# Altium PCB edgeDetector.PcbDoc
Units mm, origin at the board's own origin, x right, y up, seen from the top; angles counter-clockwise.
Board outline 152.4 x 101.6 mm, 2 copper layers (Top Layer, Bottom Layer); 5 components, 19 nets, 22 pads, 0 vias.
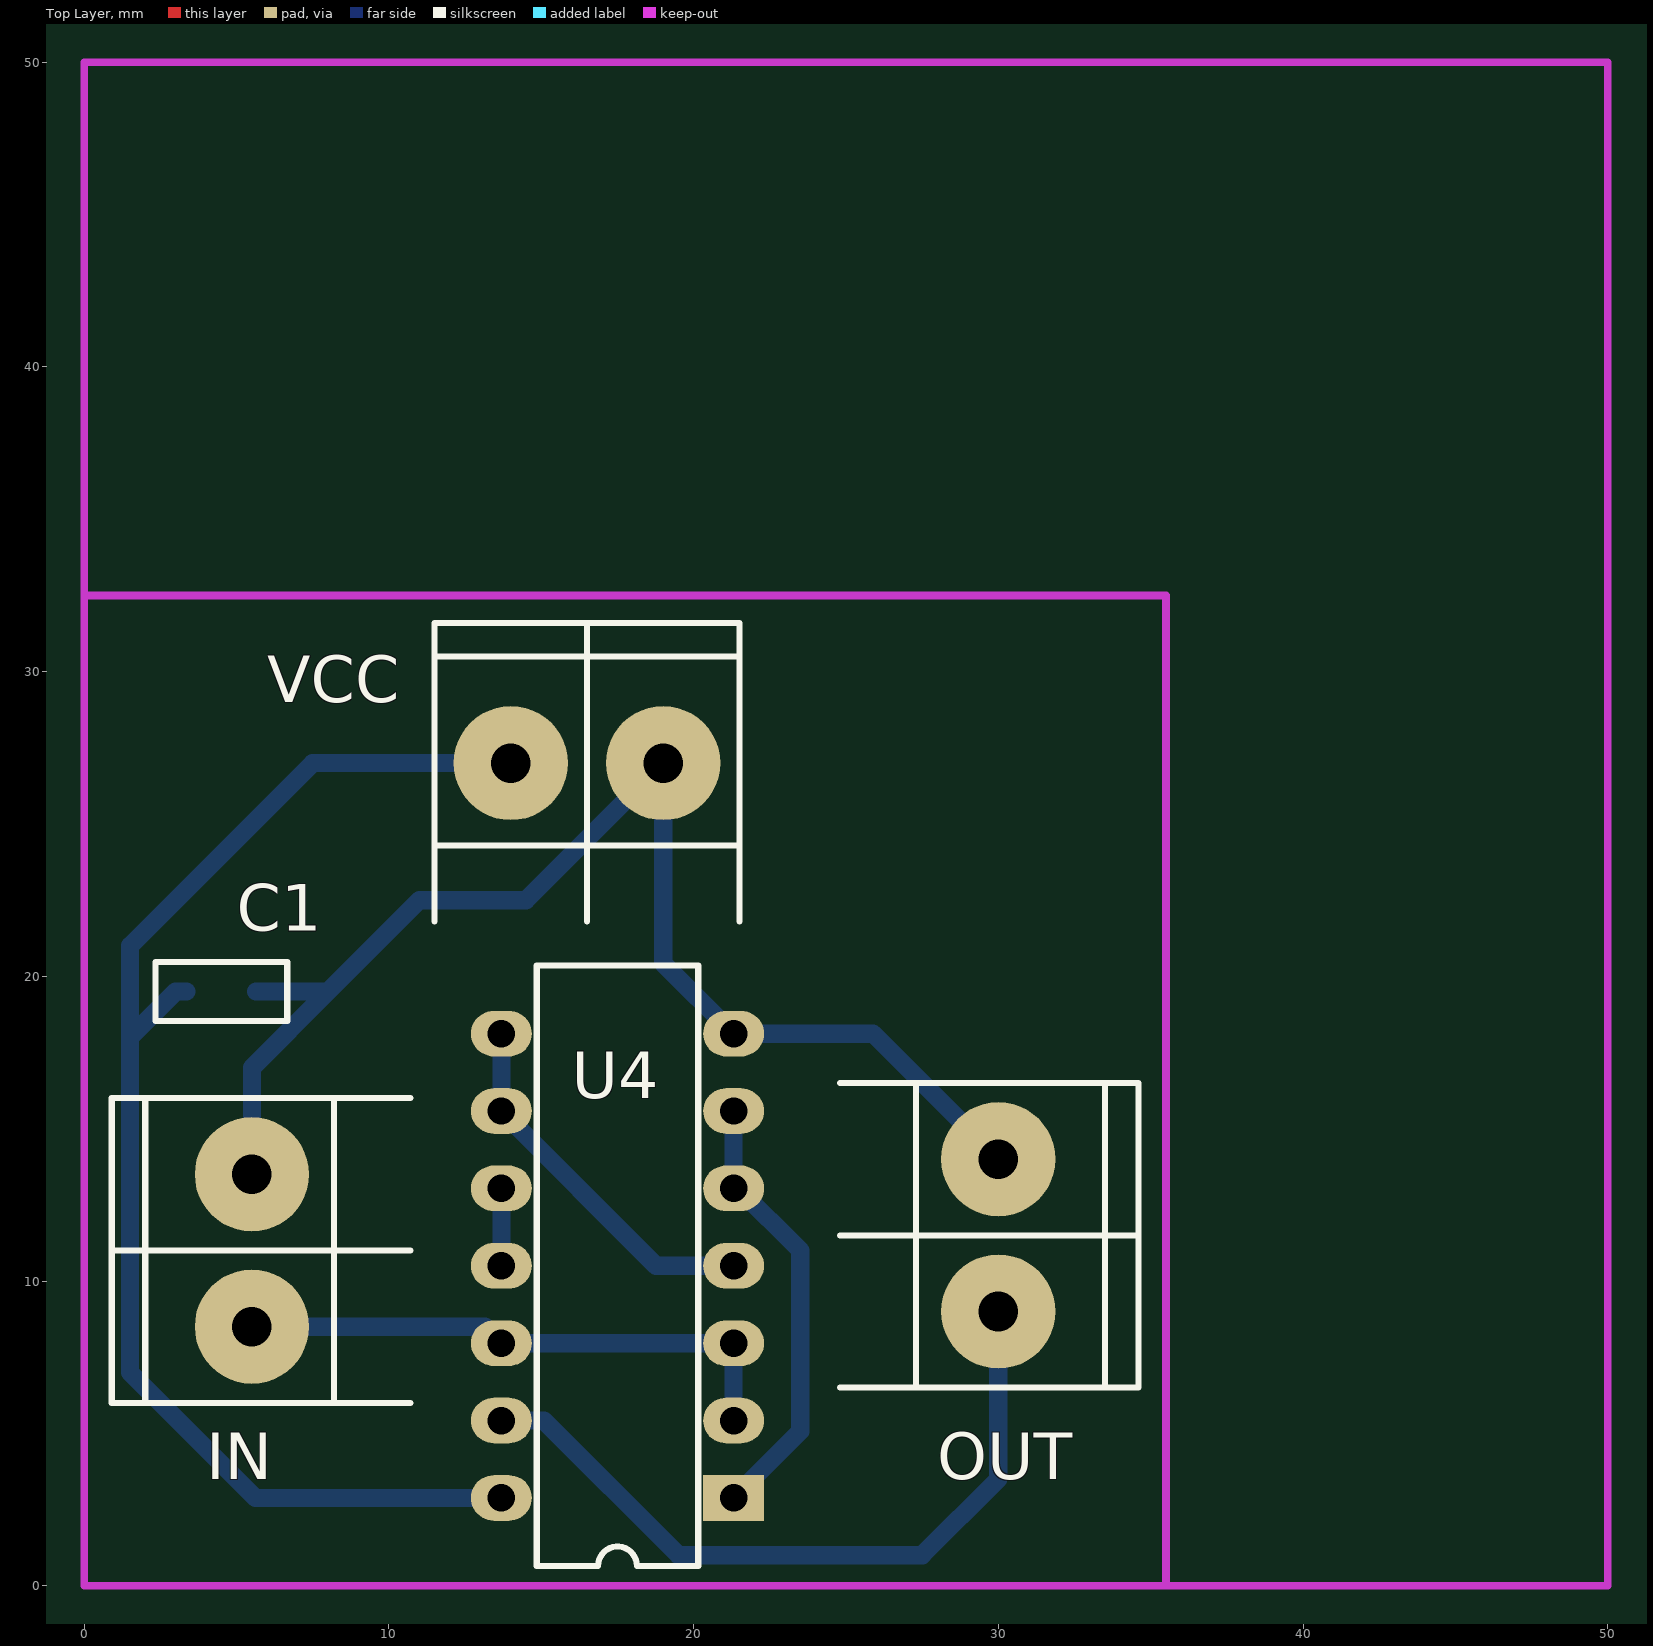
[diagram p0: Top Layer view]
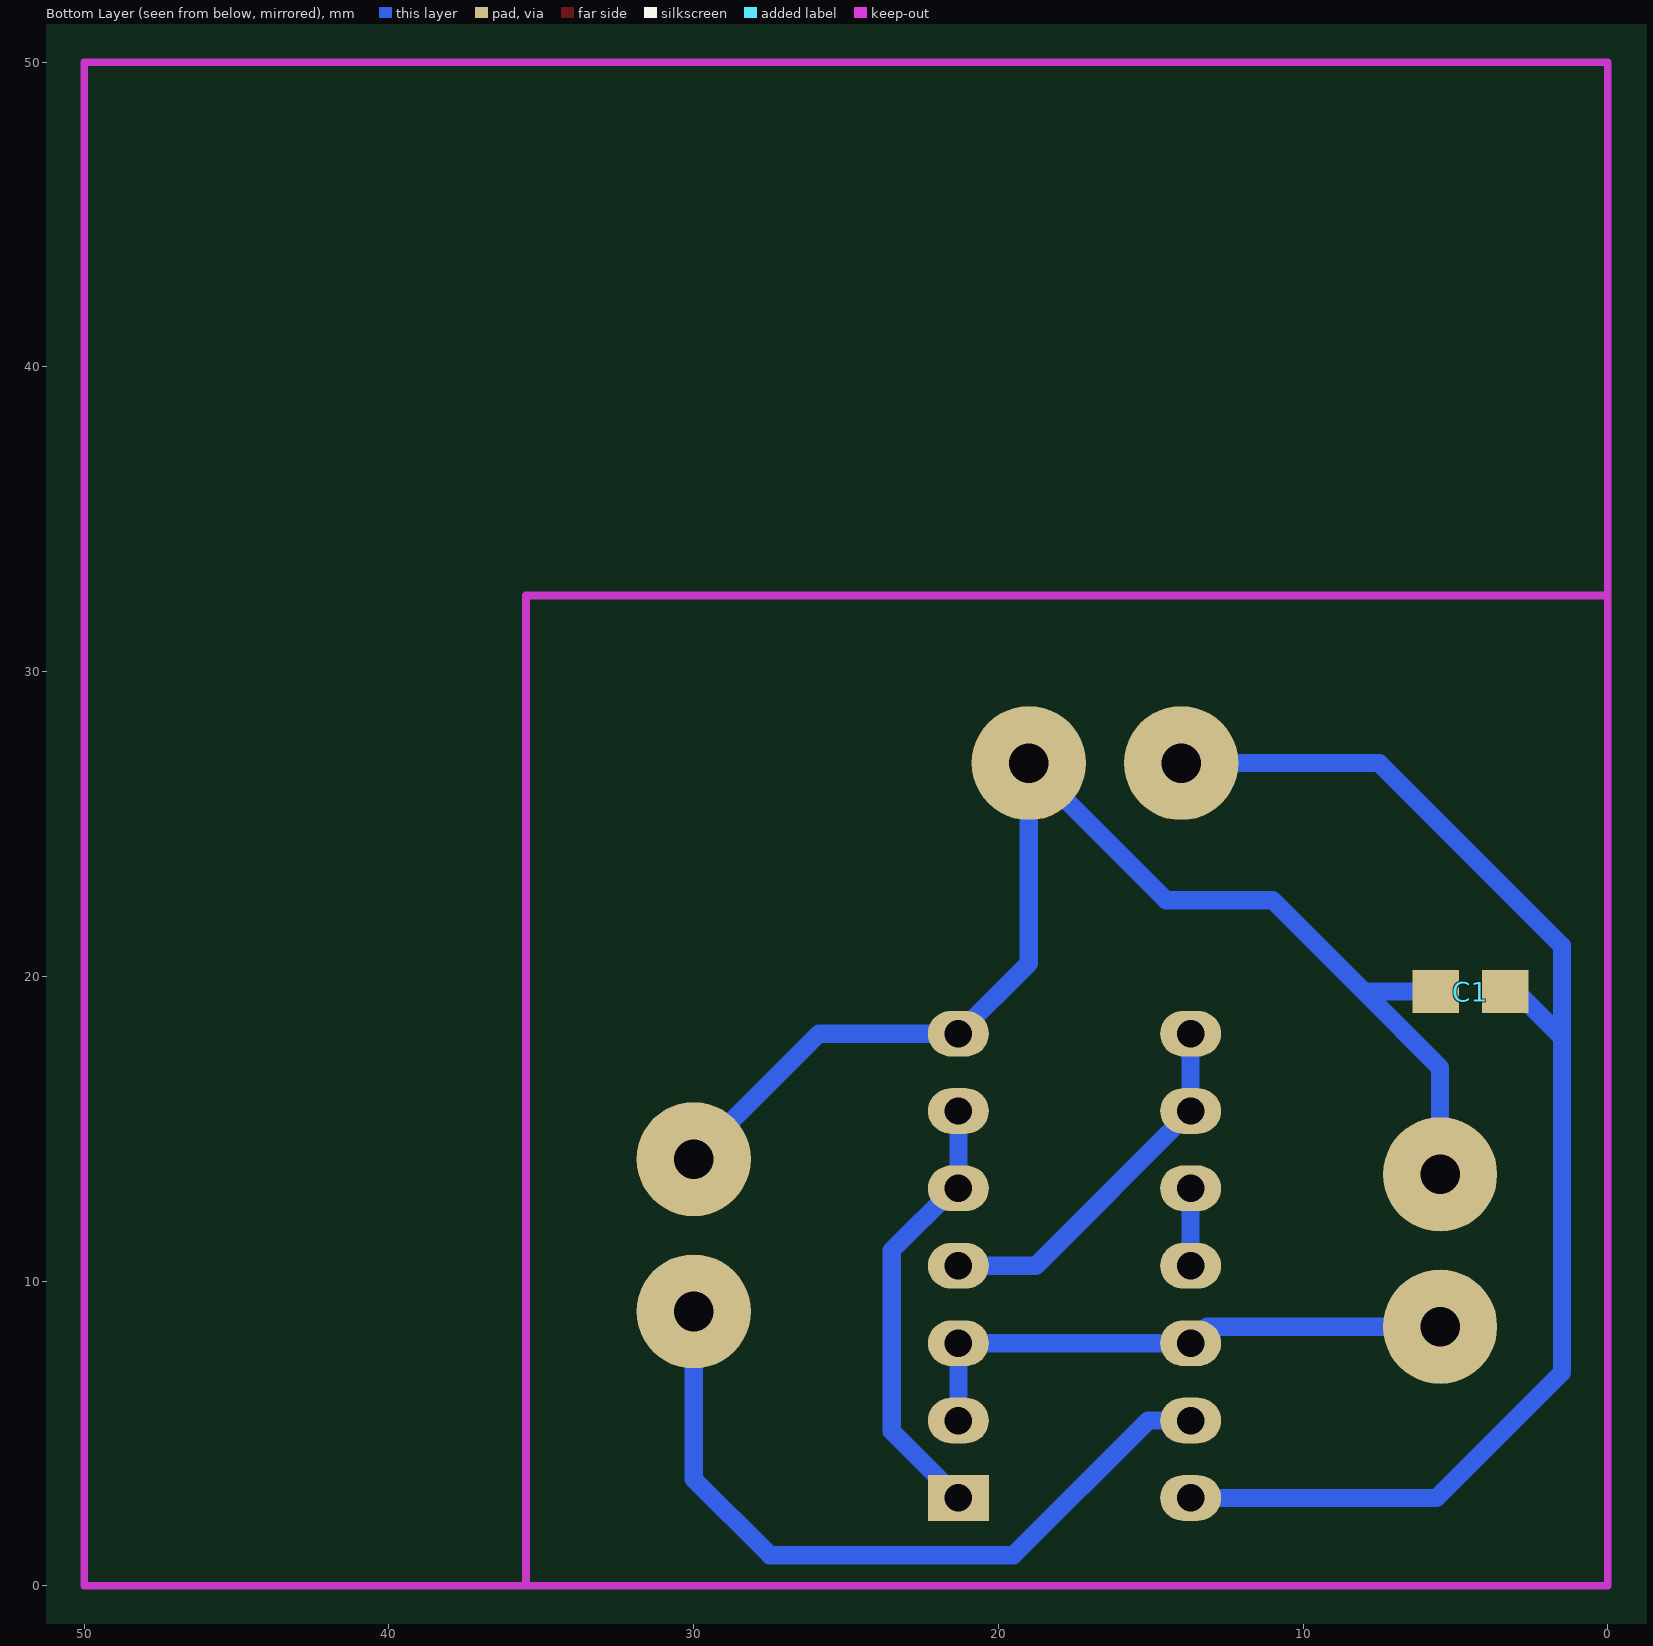
[diagram p1: Bottom Layer view, seen from below]
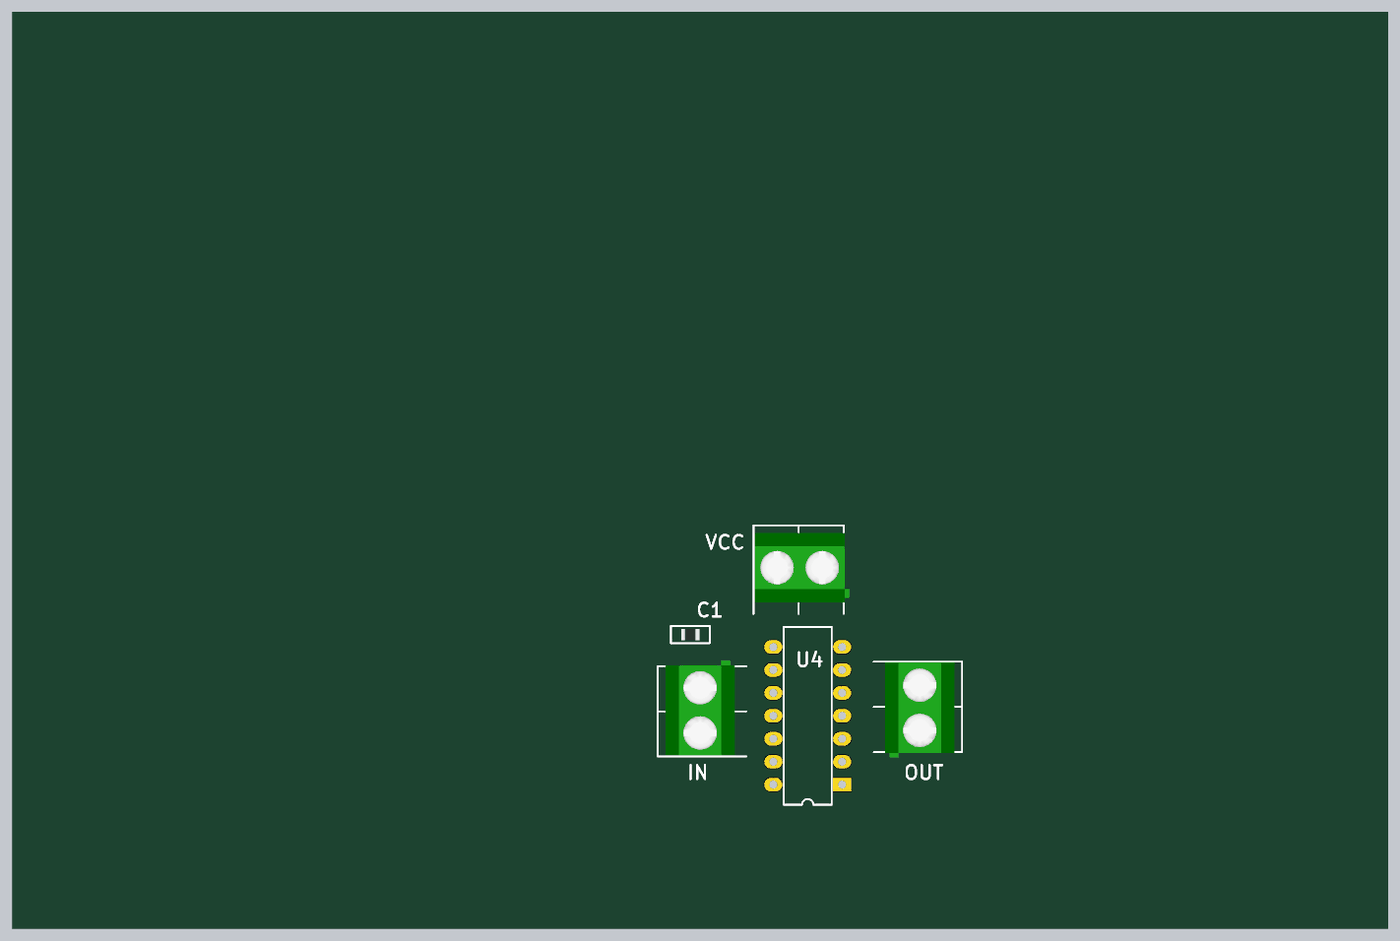
[diagram p2: 3D render of the assembled board from above, using the file's embedded part models]

## Layer stack, top to bottom
Top Solder: solder mask 0.0102, Solder Resist, Dk 3.5
Top Layer: signal copper 0.0356
Dielectric 1: dielectric 0.32, FR-4, Dk 4.8
Bottom Layer: signal copper 0.0356
Bottom Solder: solder mask 0.0102, Solder Resist, Dk 3.5

## Board outline
-70.6,-13.1 81.8,-13.1 81.8,88.5 -70.6,88.5

## Design rules (kind name [scope] priority, off if disabled: settings)
Clearance [All] p1: gap=0.254
PolygonConnect [All] p1: connectstyle=Relief reliefconductorwidth=0.254 reliefentries=4 polygonreliefangle="90 Angle" airgapwidth=0.254
RoutingVias [All] p1: holewidth=0.711 width=1.27 viastyle="Through Hole" minholewidth=0.711 minwidth=1.27 maxholewidth=0.711 maxwidth=1.27
SolderMaskExpansion [All] p1: expansion=0.102
Width [All] p1: maxlimit=0.6 minlimit=0.6 preferedwidth=0.6
30 further rules are at their usual default settings.

## Classes and differential pairs
component class edgeDetector: IN OUT U4

## Components (designator, comment, footprint, x,y, rotation, side; value= is the part's Value field where it differs from the comment)
C1 "100n" 0805 4.5,19.5 r0 top
IN "BORNERA 2" BORNERA2 5.5,11 r0 top
OUT "BORNERA 2" BORNERA2 30,11.5 r180 top
U4 "MC74HC02AN" 646-06 17.5,10.5 r90 top
VCC "BORNERA 2" BORNERA2 16.5,27 r270 top

## Footprints (in the part's own frame and the unit in brackets; to place one, negate y for a bottom-side part, rotate by r counter-clockwise, add the part's x,y. Pads: shape width x height; smd on the part's side, far side on the other; paste and mask are expansions set on the pad)
646-06 [mm] "DIP; 14 Leads; Row Spacing 7.62 mm; Pitch 2.54 mm"
  rect 1.5x2 hole 0.9: 1(-7.62,-3.81)
  oval 1.5x2 hole 0.9: 2(-5.08,-3.81) 3(-2.54,-3.81) 4(0,-3.81) 5(2.54,-3.81) 6(5.08,-3.81) 7(7.62,-3.81) 8(7.62,3.81) 9(5.08,3.81) 10(2.54,3.81) 11(0,3.81) 12(-2.54,3.81) 13(-5.08,3.81) 14(-7.62,3.81)
  silkscreen extent -9.85,-2.65 9.85,2.65
0805 [mil] "Pasivo 0805"
  rect 60x56 smd far side: 1(-45,0) 2(45,0)
  silkscreen extent -85,-38 85,38, body extent -40,-24 39,25, height 15
BORNERA2 [mm] "Bornera con Tornillos 5mm separación"
  round 3.75 hole 1.3: 1(0,2.5) 2(0,-2.5)
  silkscreen extent -4.6,-5 5.2,5, body extent -3.76,-4.89 3.94,5.61, height 10

## Part data
C1: library part CAP
U4: "Quad 2-Input NOR Gate"

## Nets (pads, with @x,y where several pads share a name; then routed paths per layer and width w, separated by ;. In a path a pad name is that pad's centre, name@x,y a point inside that pad or via, vN(x,y) a via of type N, cw(c..) or ccw(c..) an arc to the next point about the centre after c; other vN are vias at no path point)
CLCK: 
D: 
GND: C1.2 IN.1 OUT.2 U4.7 VCC.1 | length 43.7
  Bottom Layer w0.6: IN.1 5.5,17 8,19.5 ; C1.2 8,19.5 ; OUT.2 25.88,18.12 U4.7 19,20.43 VCC.1 14.5,22.5 11,22.5 8,19.5
NetIN_2: IN.2 U4.2 U4.3 U4.12 | length 18.6
  Bottom Layer w0.6: IN.2 13.15,8.5 U4.12 U4.3 U4.2
NetOUT_1: OUT.1 U4.13 | length 24.7
  Bottom Layer w0.6: U4.13 15.08,5.42 19.5,1 27.5,1 30,3.5 OUT.1
NetOutDFF_1: 
NetOutSR_1: 
NetU1_3: 
NetU2_3: 
NetU2_5: 
NetU2_6: 
NetU2_10: 
NetU4_1: U4.1 U4.5 U4.6 | length 14.6
  Bottom Layer w0.6: U4.1 23.5,5.07 23.5,11 21.46,13.04 U4.5 U4.6
NetU4_4: U4.4 U4.8 U4.9 | length 12.3
  Bottom Layer w0.6: U4.8 U4.9 18.77,10.5 U4.4
NetU4_10: U4.10 U4.11 | length 2.5
  Bottom Layer w0.6: U4.11 U4.10
R: 
S: 
VCC: C1.1 U4.14 VCC.2 | length 45.4
  Bottom Layer w0.6: C1.1 3,19.5 1.5,18 ; U4.14 5.62,2.88 1.5,7 1.5,18 ; VCC.2 7.5,27 1.5,21 1.5,18
VDD: 

## Keep-outs
Keep-Out Layer:
  lines w0.254: 0,32.5 35.5,32.5 35.5,0 ; 0,0 50,0 50,50 0,50 0,0